# Altium PCB ir-tara.PcbDoc
Units mm, origin at the board's own origin, x right, y up, seen from the top; angles counter-clockwise.
Board outline 151 x 86.38 mm, 2 copper layers (Top Layer, Bottom Layer); 19 components, 12 nets, 67 pads, 0 vias.
Unrouted connection lines stored in the file: 4.
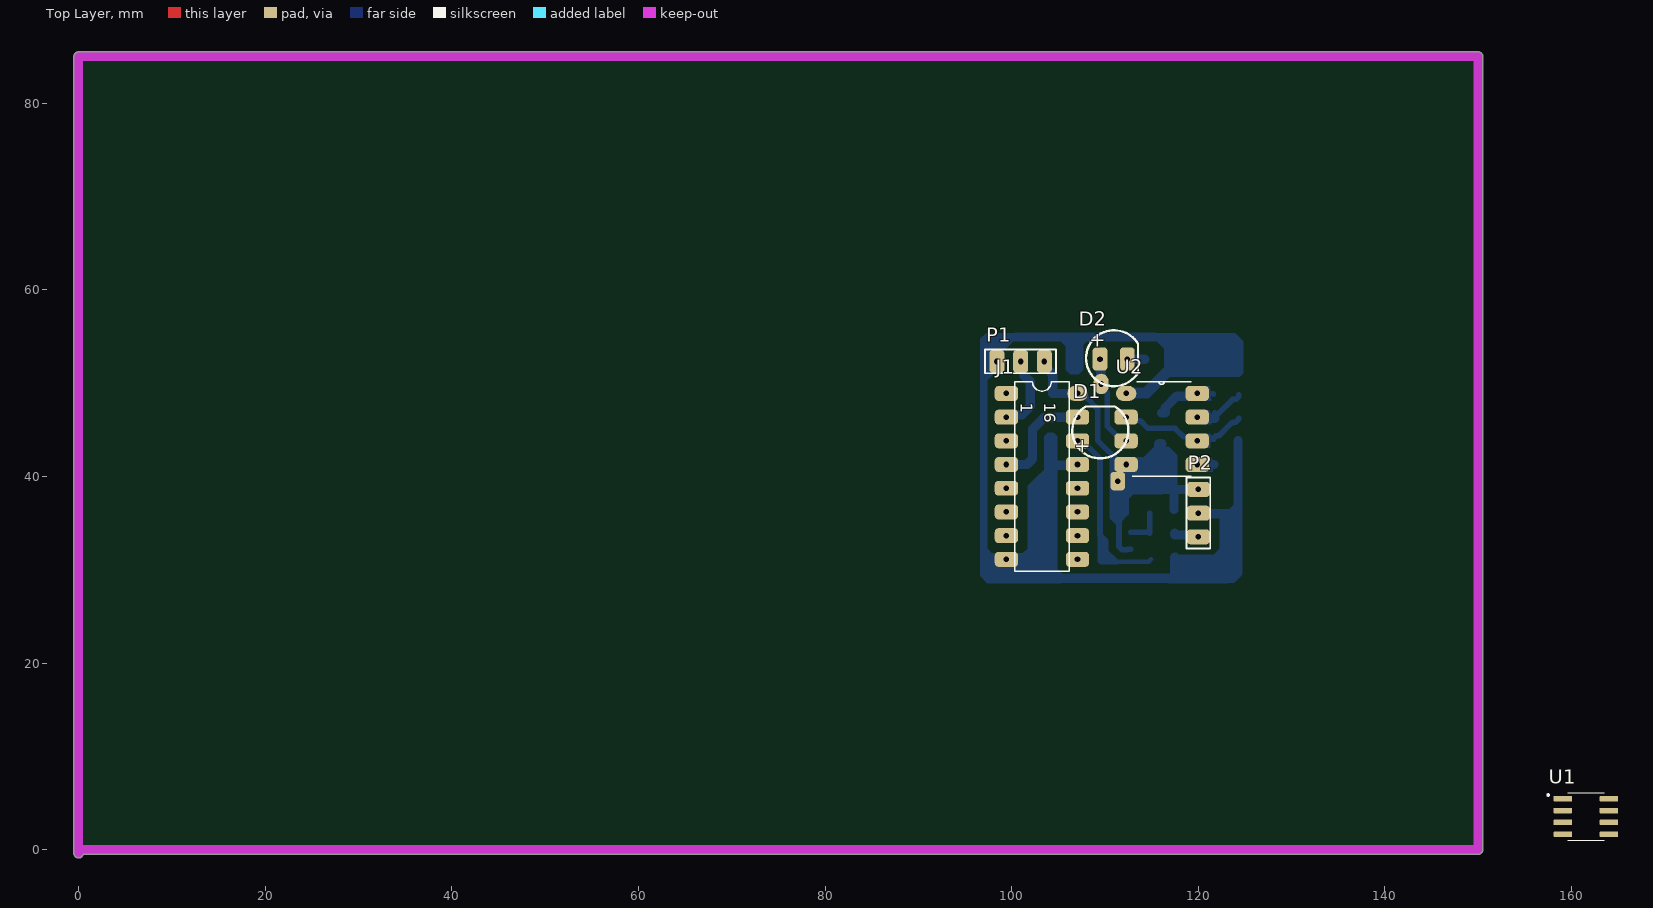
[diagram p0: Top Layer view]
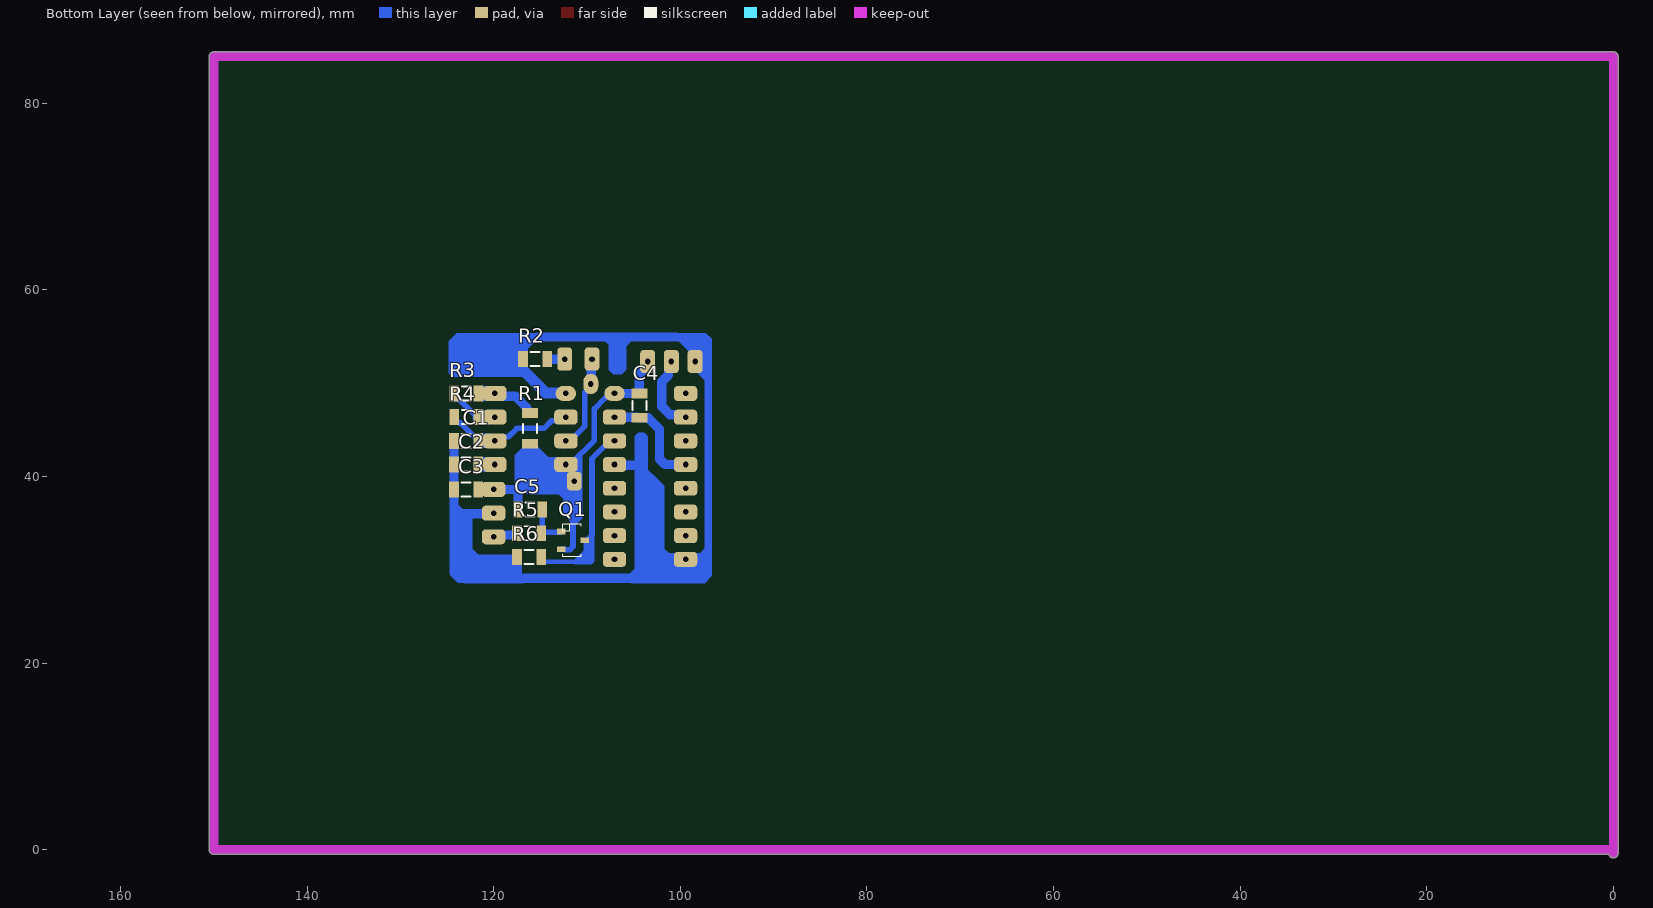
[diagram p1: Bottom Layer view, seen from below]
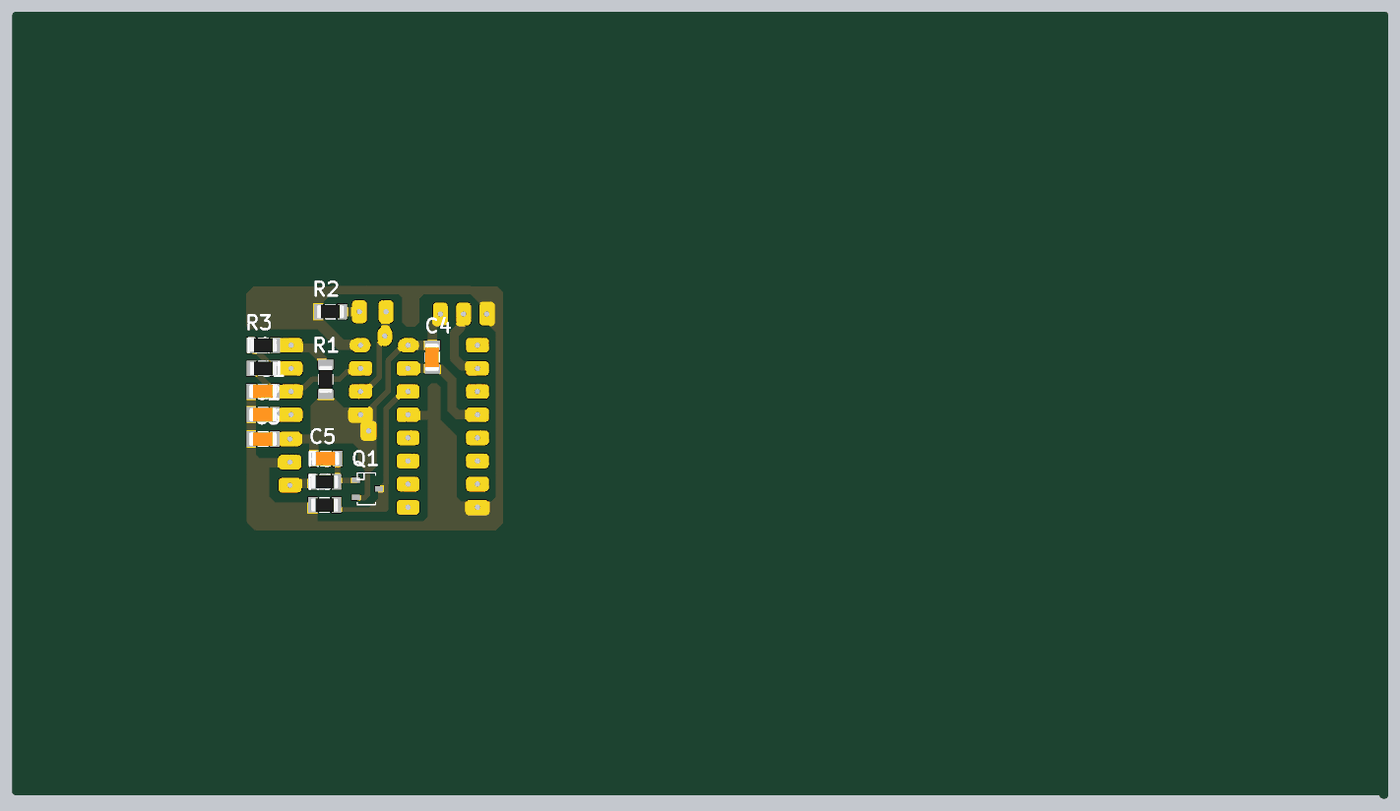
[diagram p2: 3D render of the assembled board from below, using the file's embedded part models]

## Layer stack, top to bottom
Top Solder: solder mask 0.0102, Solder Resist, Dk 3.5
Top Layer: signal copper 0.0356
Dielectric 1: dielectric 0.32, FR-4, Dk 4.8
Bottom Layer: signal copper 0.0356
Bottom Solder: solder mask 0.0102, Solder Resist, Dk 3.5

## Board outline
-0.5,-0.381 -0.5,85 cw(c0,85) 0,85.5 150,85.5 cw(c150,85) 150.5,85 150.5,0 cw(c150,0) 150,-0.5 0.486,-0.5 cw(c0,-0.381)

## Design rules (kind name [scope] priority, off if disabled: settings)
Clearance Clearance_1 [InPolygon] p1: gap=0.8 ignorepadtopadclearanceinfootprint=FALSE
Clearance [All] p2: gap=0.254 ignorepadtopadclearanceinfootprint=FALSE except(0: Arc-Hole Track-Hole SMDPad-Hole THPad-Hole Via-Hole Fill-Hole Poly-Hole Region-Hole Text-Hole)
PolygonConnect [All] p1: connectstyle=Relief reliefconductorwidth=0.254 reliefentries=4 polygonreliefangle="90 Angle" airgapwidth=0.254
RoomDefinition ir-tara [InComponentClass('ir-tara')] p1: confinementstyle=ConfineIn formatcopy=TRUE lockcomponents=FALSE outline 144.907,-4.953 247.904,-4.953 247.904,23.114 144.907,23.114
RoutingLayers [All] p1: top layer_v5=FALSE bottom layer_v5=TRUE
RoutingVias [All] p1: holewidth=0.711 width=2.5 viastyle="Through Hole" minholewidth=0.711 minwidth=1.27 maxholewidth=0.711 maxwidth=2
SolderMaskExpansion [All] p1: expansion=0.102 istentingtop=FALSE
Width [All] p1: maxlimit=3 minlimit=0.5 preferedwidth=1
29 further rules are at their usual default settings.

## Components (designator, comment, footprint, x,y, rotation, side; value= is the part's Value field where it differs from the comment)
C1 "=Value" "CAP 1206" 122.936,43.815 r0 bottom
C2 "=Value" "CAP 1206" 122.936,41.275 r0 bottom
C3 "=Value" "CAP 1206" 122.936,38.608 r0 bottom
C4 "=Value" "CAP 1206" 104.394,47.625 r270 bottom
C5 "=Value" "CAP 1206" 116.078,36.449 r0 bottom
D1 "MODEL" LED-5mm#1 109.601,44.831 r180 top
D2 "MODEL" LED-5mm#2 110.871,52.578 r90 top
J1 "-4017" DIL16 103.251,40.005 r270 top
P1 "Header 3" HDR1X3 103.505,52.324 r180 top
P2 "Header 3" HDR1X3 120.015,38.608 r270 top
Q1 "2N3906" SOT23-3 111.633,34.417 r270 bottom
R1 "10K" "RES 1206 (3216X08L)"#1 116.101,45.157 r270 bottom
R2 "10K" "RES 1206 (3216X08L)"#2 115.57,52.578 r0 bottom
R3 "10K" "RES 1206 (3216X08L)"#2 122.936,48.895 r180 bottom
R4 "10K" "RES 1206 (3216X08L)"#2 122.936,46.355 r180 bottom
R5 "10K" "RES 1206 (3216X08L)"#2 116.205,33.909 r180 bottom
R6 "10K" "RES 1206 (3216X08L)"#2 116.205,31.369 r0 bottom
U1 "LM555CM/NOPB" SOIC127P599X175-8N 161.544,3.556 r0 top
U2 "LM555CN" DIP254P762X533-8 119.888,41.275 r0 top

## Footprints (in the part's own frame and the unit in brackets; to place one, negate y for a bottom-side part, rotate by r counter-clockwise, add the part's x,y. Pads: shape width x height; smd on the part's side, far side on the other; paste and mask are expansions set on the pad)
"CAP 1206" [mm]
  rect 1.05x1.7 smd: 1(-1.27,0) 2(1.326,0)
  silkscreen extent -0.47,-0.75 0.53,0.75, body extent -1.49,-0.77 1.55,0.75, height 0.75
DIL16 [mm]
  rrect50% 1.6x2.5 hole 0.6: 1(-8.89,-3.81) 2(-6.35,-3.81) 3(-3.81,-3.81) 4(-1.27,-3.81) 5(1.27,-3.81) 6(3.81,-3.81) 7(6.35,-3.81) 8(8.89,-3.81) 9(8.89,3.81) 10(6.35,3.81) 11(3.81,3.81) 12(1.27,3.81) 13(-1.27,3.81) 14(-3.81,3.81) 15(-6.35,3.81)
  oval 1.6x2.2 hole 0.6: 16(-8.89,3.81)
  silkscreen extent -10.16,-2.92 10.16,2.92
DIP254P762X533-8 [mm]
  oval 2.2x1.6 hole 0.6: 1(-7.62,7.62)
  rrect50% 2.5x1.6 hole 0.6: 2(-7.62,5.08) 3(-7.62,2.54) 4(-7.62,0) 5(0,0) 6(0,2.54) 7(0,5.08) 8(0,7.62)
  silkscreen extent -6.98,-1.27 -0.64,8.89
HDR1X3 [mm] "Connector; Header; 3 Position"
  rrect50% 1.6x2.5 hole 0.6: 1(0,0) 2(2.54,0) 3(5.08,0)
  silkscreen extent -1.27,-1.27 6.35,1.27
LED-5mm#1 [mm] "LED; 2 Leads"
  rrect50% 1.6x2 hole 0.6: 1(-1.772,5.334)
  oval 1.6x2.2 hole 0.6: 2(0,-5.08)
  silkscreen extent -2.91,-2.67 3.09,2.9
LED-5mm#2 [mm] "LED; 2 Leads"
  rrect50% 2.5x1.6 hole 0.6: 1(0,1.397) 2(0,-1.524)
  silkscreen extent -2.91,-2.67 3.09,2.9
"RES 1206 (3216X08L)"#1 [mm] "Chip Resistor, 2-Leads, Body 3.2x1.6mm, IPC High Density _ (0.125 W)"
  rect 1.05x1.7 smd: 1(-1.646,0) 2(1.656,0)
  silkscreen extent -0.5,-0.75 0.5,0.75, body extent -1.52,-0.76 1.53,0.76, height 0.6
"RES 1206 (3216X08L)"#2 [mm] "Chip Resistor, 2-Leads, Body 3.2x1.6mm, IPC High Density _ (0.125 W)"
  rect 1.05x1.7 smd: 1(-1.295,0) 2(1.301,0)
  silkscreen extent -0.5,-0.75 0.5,0.75, body extent -1.52,-0.76 1.53,0.76, height 0.6
SOIC127P599X175-8N [mm]
  rrect25% 1.97x0.6 smd: 1(-2.47,1.905) 2(-2.47,0.635) 3(-2.47,-0.635) 4(-2.47,-1.905) 5(2.47,-1.905) 6(2.47,-0.635) 7(2.47,0.635) 8(2.47,1.905)
  silkscreen extent -4.14,-2.52 1.95,2.52
SOT23-3 [mm]
  rect 0.6x0.9 smd: 1(0.32,-1.15) 2(2.22,-1.15) 3(1.27,1.397)
  silkscreen extent -0.48,-1 3.02,1

## Part data
C1 C2 C3 C4 C5: library part Capacitor, "Capacitor"
D1 D2: library part "LED 5mm", "Typical LED", COLOR=RED
J1: "10000pF Â±1% 25V Ceramic Capacitor C0G, NP0 0603 (1608 Metric)", Package="0603 Heyco", Availability=Warning, MF=Heyco, Mouser-Purchase-URL=https://snapeda.com/shop?store=Mouser&id=51486, MP=4017, Price=None, SnapEDA_Link=https://www.snapeda.com/parts/4017/Heyco/view-part/51486/?ref=snap
P1 P2: "Header, 3-Pin", LatestRevisionDate=17-Jul-2002, LatestRevisionNote="Re-released for DXP Platform.", Publisher="Altium Limited"
Q1: "PNP General Purpose Amplifier", ComponentLink1Description="Manufacturer Link", ComponentLink1URL=http://www.fairchildsemi.com/, ComponentLink2Description=Datasheet, ComponentLink2URL=http://www.fairchildsemi.com/ds/2N%2F2N3906.pdf, DatasheetVersion=1997, LatestRevisionDate=15-Jan-2003, LatestRevisionNote="PCB Footprint 'BCY-W3/D4.7' replaced", PackageDescription="TO, Flat Index; 3 In-Line, Axial Leads; Body Dia. 4.5mm; Leads 0.51 x 0.48 mm (max)", PackageReference=TO-92A, PackageVersion=Sep-1998, Published=8-Jun-2000, Publisher="Altium Limited"
R1 R2 R3 R4 R5 R6: library part Resistor, "Resistor", Power="1/4 W", Tolerance=5%
U1: "Highly Stable 555 Timer 8-SOIC 0 to 70", Package=None, Availability=Unavailable, MP=LM555CM/NOPB, Price=None
U2: "555 Type, Timer/Oscillator _Single_ IC 100kHz 8-PDIP", Package="DIP-8 Intersil", Availability=Unavailable, MF="Texas Instruments", MP=LM555CN, Price=None, SnapEDA_Link=https://www.snapeda.com/parts/LM555CN/Texas%20Instruments/view-part/2617191/?ref=snap

## Nets (pads, with @x,y where several pads share a name; then routed paths per layer and width w, separated by ;. In a path a pad name is that pad's centre, name@x,y a point inside that pad or via, vN(x,y) a via of type N, cw(c..) or ccw(c..) an arc to the next point about the centre after c; other vN are vias at no path point)
GND: C1.2 C2.2 C3.2 J1.8 J1.13 P1.3 P2.2 R2.2 R6.2 U2.1 | length 113
  Bottom Layer w0.6: 97.028,32.258 97.862,31.424 99.132,31.424 J1.8 ; 97.028,50.361 97.987,51.32 97.987,51.382 P1.3@98.568,51.963 ; P1.3 98.844,52.743 98.844,53.545 100.417,55.118 115.316,55.118 116.646,53.788 116.646,52.803 R2.2
  Bottom Layer w0.8: 97.028,32.258 97.028,50.361
  Bottom Layer w1: J1.8 99.502,31.054 101.28,31.054 ; J1.13 107,41.214 104.714,41.214 103.251,39.751 103.251,32.004 102.171,30.924 102.042,31.054 101.28,31.054 ; U2.1 112.383,49.01 114.542,49.01 116.846,51.314 116.846,52.553 R2.2 ; R6.2 117.481,31.344 117.481,30.676 117.475,30.671 117.475,29.083 ; P2.2@120.015,36.005 124.262,36.005 ; C1.2 124.262,43.49 C2.2 C3.2 124.262,36.005 ; 101.28,31.054 103.251,29.083 117.475,29.083 ; 117.475,29.083 123.676,29.083 124.262,29.669 124.262,36.005
NetC1_1: C1.1 R4.1 U2.2 U2.6 | length 13.4
  Bottom Layer w0.6: U2.2 112.641,45.982 113.784,45.982 114.609,45.157 117.53,45.157 118.436,44.251 119.325,44.251 U2.6@119.588,43.988 ; C1.1@121.666,44.013 121.666,44.14 121.891,44.365 122.216,44.365 123.579,45.728 123.655,45.728 123.732,45.805 124.006,45.805 124.358,46.157 R4.1@124.358,46.228
  Bottom Layer w1: U2.6@119.588,43.988 U2.6@119.888,43.688 ; U2.6@119.761,43.688 U2.6@120.698,43.942
NetC2_1: C2.1 U2.5 | length 1.8
  Bottom Layer w1: U2.5 C2.1
NetC4_2: C4.2 J1.4 J1.5 J1.6 J1.7 J1.15 | length 11.3
  Bottom Layer w1: J1.4 101.649,41.275 102.235,41.861 102.235,45.053 103.456,46.274 104.369,46.274 C4.2 ; C4.2@104.648,46.355 J1.15
NetC5_1: C5.1 Q1.1 R5.2 | length 4.3
  Bottom Layer w0.6: Q1.1@112.776,34.036 114.729,34.036 114.793,33.973 114.793,33.909 114.793,36.053 C5.1@114.808,36.068
NetD1_2: D1.2 D2.1 U2.3 | length 10.2
  Bottom Layer w0.6: D1.2@109.62,49.638 110.236,49.022 110.236,45.397 111.818,43.815 U2.3
  Bottom Layer w1: D2.1 109.537,52.514 109.537,49.974 D1.2 ; U2.3@112.268,43.688 U2.3@112.45,43.506
NetD2_2: D2.2 R2.1 | length 1.9
  Bottom Layer w1: D2.2 R2.1
NetJ1_14: J1.14 Q1.3 R6.1 | length 18.8
  Bottom Layer w0.5: Q1.3@110.109,33.036 110.109,32.004 111.252,30.861 114.681,30.861 R6.1@114.935,31.115
  Bottom Layer w0.6: J1.14 107.565,43.815 108.065,43.315 108.069,43.315 109.474,41.91 109.474,33.714 109.952,33.236 109.952,33.086 Q1.3@110.102,33.086
NetP2_3: P2.3 R5.1 | length 2.4
  Bottom Layer w1: R5.1 117.5,33.743 117.525,33.718 119.265,33.718 119.507,33.477 P2.3@119.507,33.401
NetR3_1: R3.1 R4.2 U2.7 | length 6
  Bottom Layer w0.6: R4.2@121.762,46.355 R4.2@121.762,46.807 ; R4.2@121.762,46.68 121.81,46.728 122.166,46.728 123.706,48.268 124.056,48.268 124.358,48.57 R3.1@124.358,48.768
  Bottom Layer w1: U2.7@119.761,46.228 R4.2@121.762,46.228
o1: J1.2 P1.2 | length 8.3
  Bottom Layer w1: J1.2 99.711,46.625 101.108,46.625 101.981,47.498 101.981,50.165 101.265,50.881 101.265,52.024 P1.2
VCC: C3.1 C4.1 C5.2 D1.1 J1.16 P1.1 P2.1 Q1.2 R1.1 R1.2 R3.2 U2.4 U2.8 | length 50.9
  Bottom Layer w0.5: U2.8 R3.2 R3.2@121.635,48.768
  Bottom Layer w0.6: J1.16 107.565,48.895 108.065,48.395 108.069,48.395 109.22,47.244 109.22,43.873 111.818,41.275 U2.4 ; Q1.2@112.776,32.197 112.457,32.197 112.396,32.136 111.857,32.136 111.506,32.487 111.506,35.306 112.268,36.068 U2.4 ; U2.4@113.03,40.513 113.018,40.525 U2.4
  Bottom Layer w1: P1.1 103.505,51.874 103.805,51.574 103.808,51.574 104.394,50.988 C4.1 ; C4.1@104.648,48.895 J1.16 ; U2.4 112.718,41.275 113.018,40.975 U2.4@113.018,40.525 ; U2.4@112.568,41.575 114.346,41.575 115.751,42.98 115.751,43.476 115.776,43.501 R1.2 ; U2.4@113.03,40.513 114.935,38.608 117.475,38.608 ; R1.1 116.426,46.803 116.451,46.828 116.451,47.363 117.683,48.595 119.588,48.595 U2.8 ; C5.2 117.404,38.537 117.475,38.608 ; P2.1 117.475,38.608
pads on no net: J1.1 J1.3 J1.9 J1.10 J1.11 J1.12 U1.1 U1.2 U1.3 U1.4 U1.5 U1.6 U1.7 U1.8

## Polygon pours and split planes (outlines as drawn)
GND on Bottom Layer "GND_L02_P002" (solid, pour order 2): 116.332,39.751
no net on Bottom Layer "NONET_L02_P000" (solid, pour order 0): 91.059,37.973

## Keep-outs
Keep-Out Layer:
  lines w1: 0,-0.381 0,85 150,85 150,0 0,0

## Other copper
Bottom Layer:
  region net NetC2_1: 121.412,42.037 120.142,42.037 120.142,40.513 121.539,40.513 121.539,41.148 121.666,41.275
  region net NetC1_1: 121.285,44.577 120.269,44.577 120.269,43.18 120.396,43.18 120.523,43.053 121.285,43.053 121.285,43.632 121.666,44.013
  region net NetR3_1: 121.158,47.117 120.396,47.117 120.396,45.593 121.412,45.593 121.412,46.736
  region net VCC: 121.26,49.657 120.269,49.657 120.269,48.133 121.412,48.133
  region net GND: 112.141,54.61 108.204,54.61 107.696,54.102 107.696,51.435 107.188,50.927 106.299,50.927 105.791,51.435 105.791,53.975 104.619,55.147
  region net NetJ1_14: 109.22,34.671 109.22,30.861 109.474,30.607 111.379,30.607 111.379,30.861 110.236,32.004 110.109,32.004 110.109,33.004 110.027,33.086
  region net GND: 103.505,40.005 103.505,44.323 103.886,44.704 104.521,44.704 104.902,44.323 104.902,41.021
  region net GND: 99.949,54.483 117.221,54.483 118.11,55.372 99.695,55.372 99.314,54.991
  region net GND: 115.965,55.372 123.952,55.372 124.841,54.483 124.841,51.054 124.46,50.673 116.967,50.673 114.681,48.387 113.03,48.387 117.211,52.568
  region net GND: 117.729,31.623 121.666,31.623 122.301,32.258 122.301,36.195 123.063,36.195 124.206,37.338 124.206,37.592 124.714,37.084 124.714,30.121 123.168,28.575 116.858,28.575
  region net VCC: 114.935,41.91 116.205,43.18 116.84,43.18 117.729,42.291 117.729,38.989 117.094,38.989 116.205,38.1 113.03,38.1 112.141,37.211 112.141,35.56 111.316,34.735 110.519,35.531 110.519,42.574 110.715,42.574 111.379,41.91
  region net GND: 96.647,33.147 96.647,29.337 97.409,28.575 105.283,28.575 105.918,29.21 105.791,29.337 105.664,29.337 104.902,30.099 104.902,41.025 104.333,41.595 101.727,38.989 101.727,32.258 101.219,31.75 97.409,31.75 96.901,32.258
  region net GND: 96.647,50.292 96.647,54.737 97.282,55.372 100.965,55.372 98.044,52.451 98.044,51.308

## Text inside footprints (layer, text, board x,y; h text height)
D1: Top Overlay "+" at 106.934,44.069 h1.52 r270
D2: Top Overlay "+" at 110.109,55.245 h1.52 r180
J1: Top Overlay "16" at 103.505,47.885 h1.27 r270; Top Overlay "1" at 100.962,47.889 h1.27 r270